# Altium PCB InfoDisplay.PcbDoc (part 1 of 2)
Units mil, origin at the board's own origin, x right, y up, seen from the top; angles counter-clockwise.
Board outline 4606.3 x 1732.28 mil, 2 copper layers (Top Layer, Bottom Layer), stack 65.792 mil thick; 219 components, 174 nets, 685 pads, 194 vias.
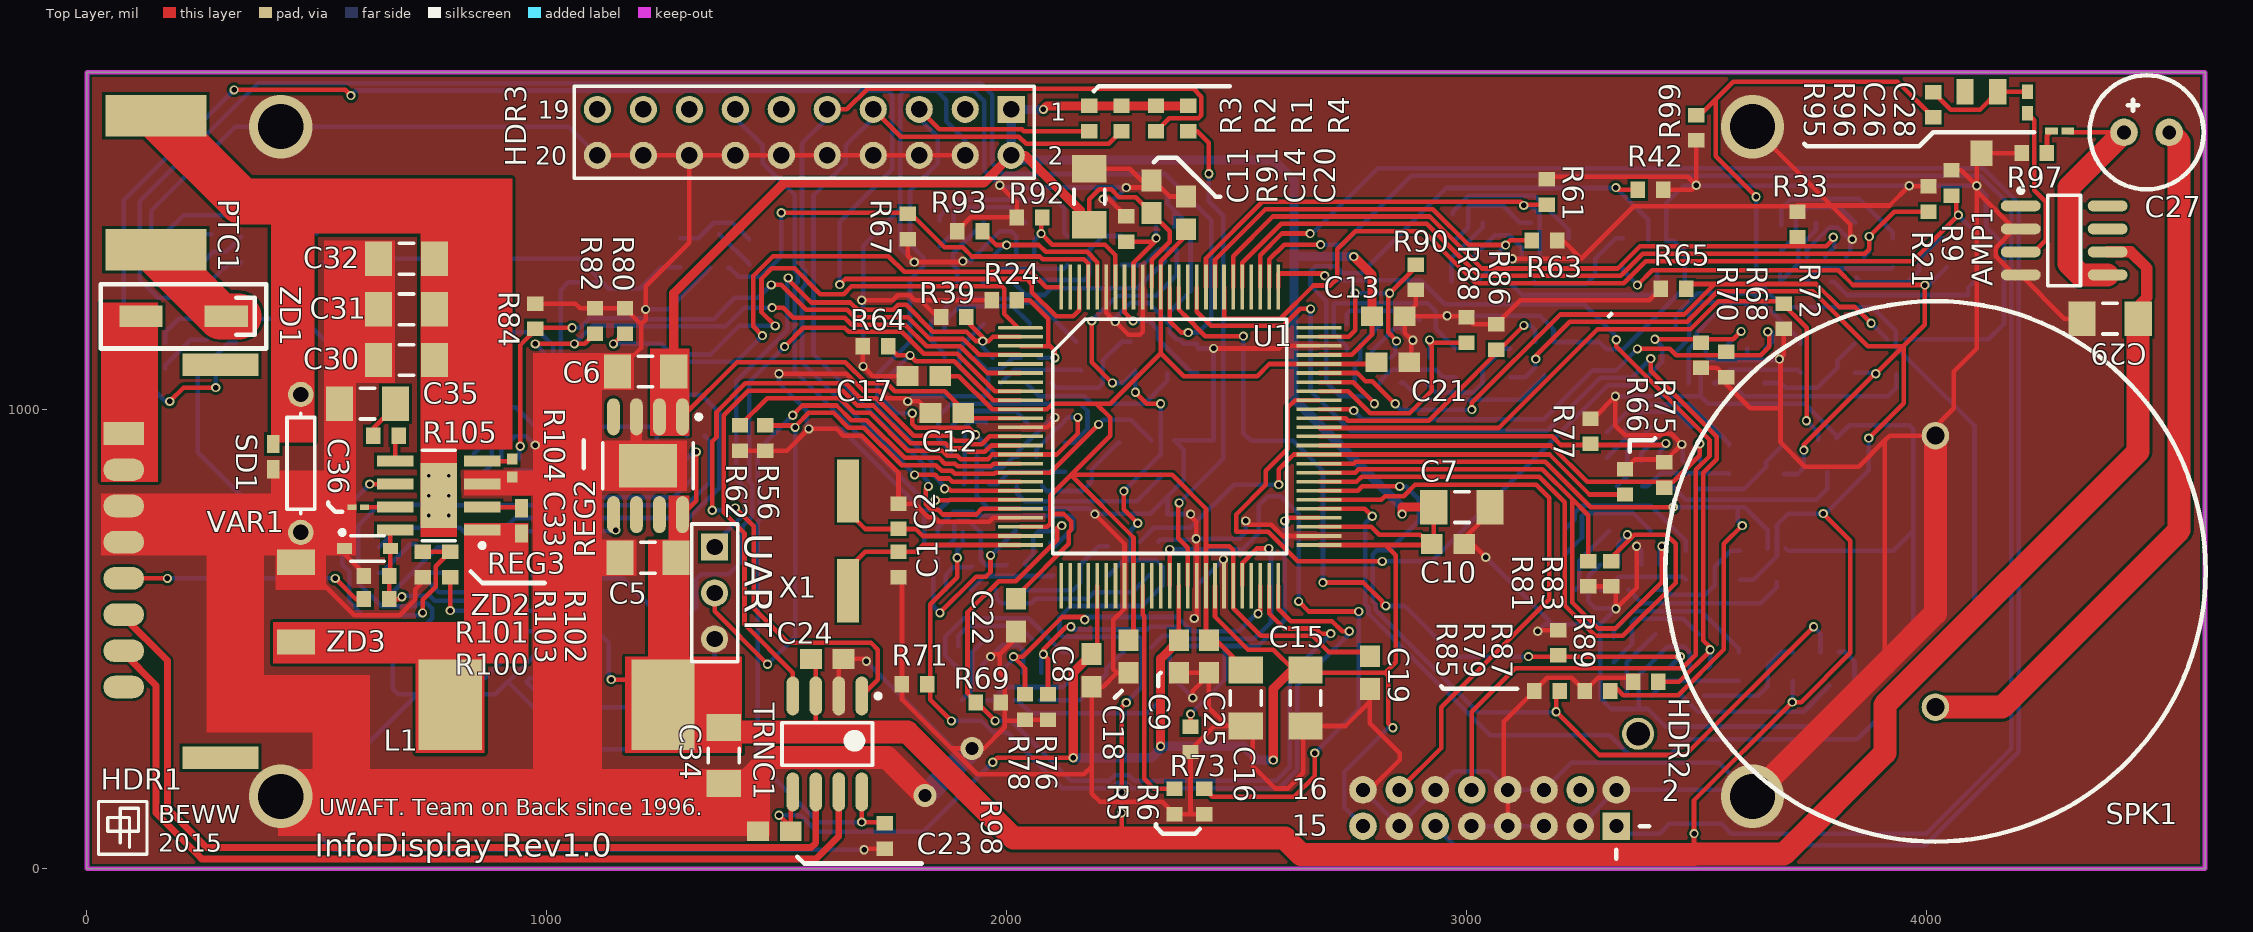
[diagram p0: Top Layer view]
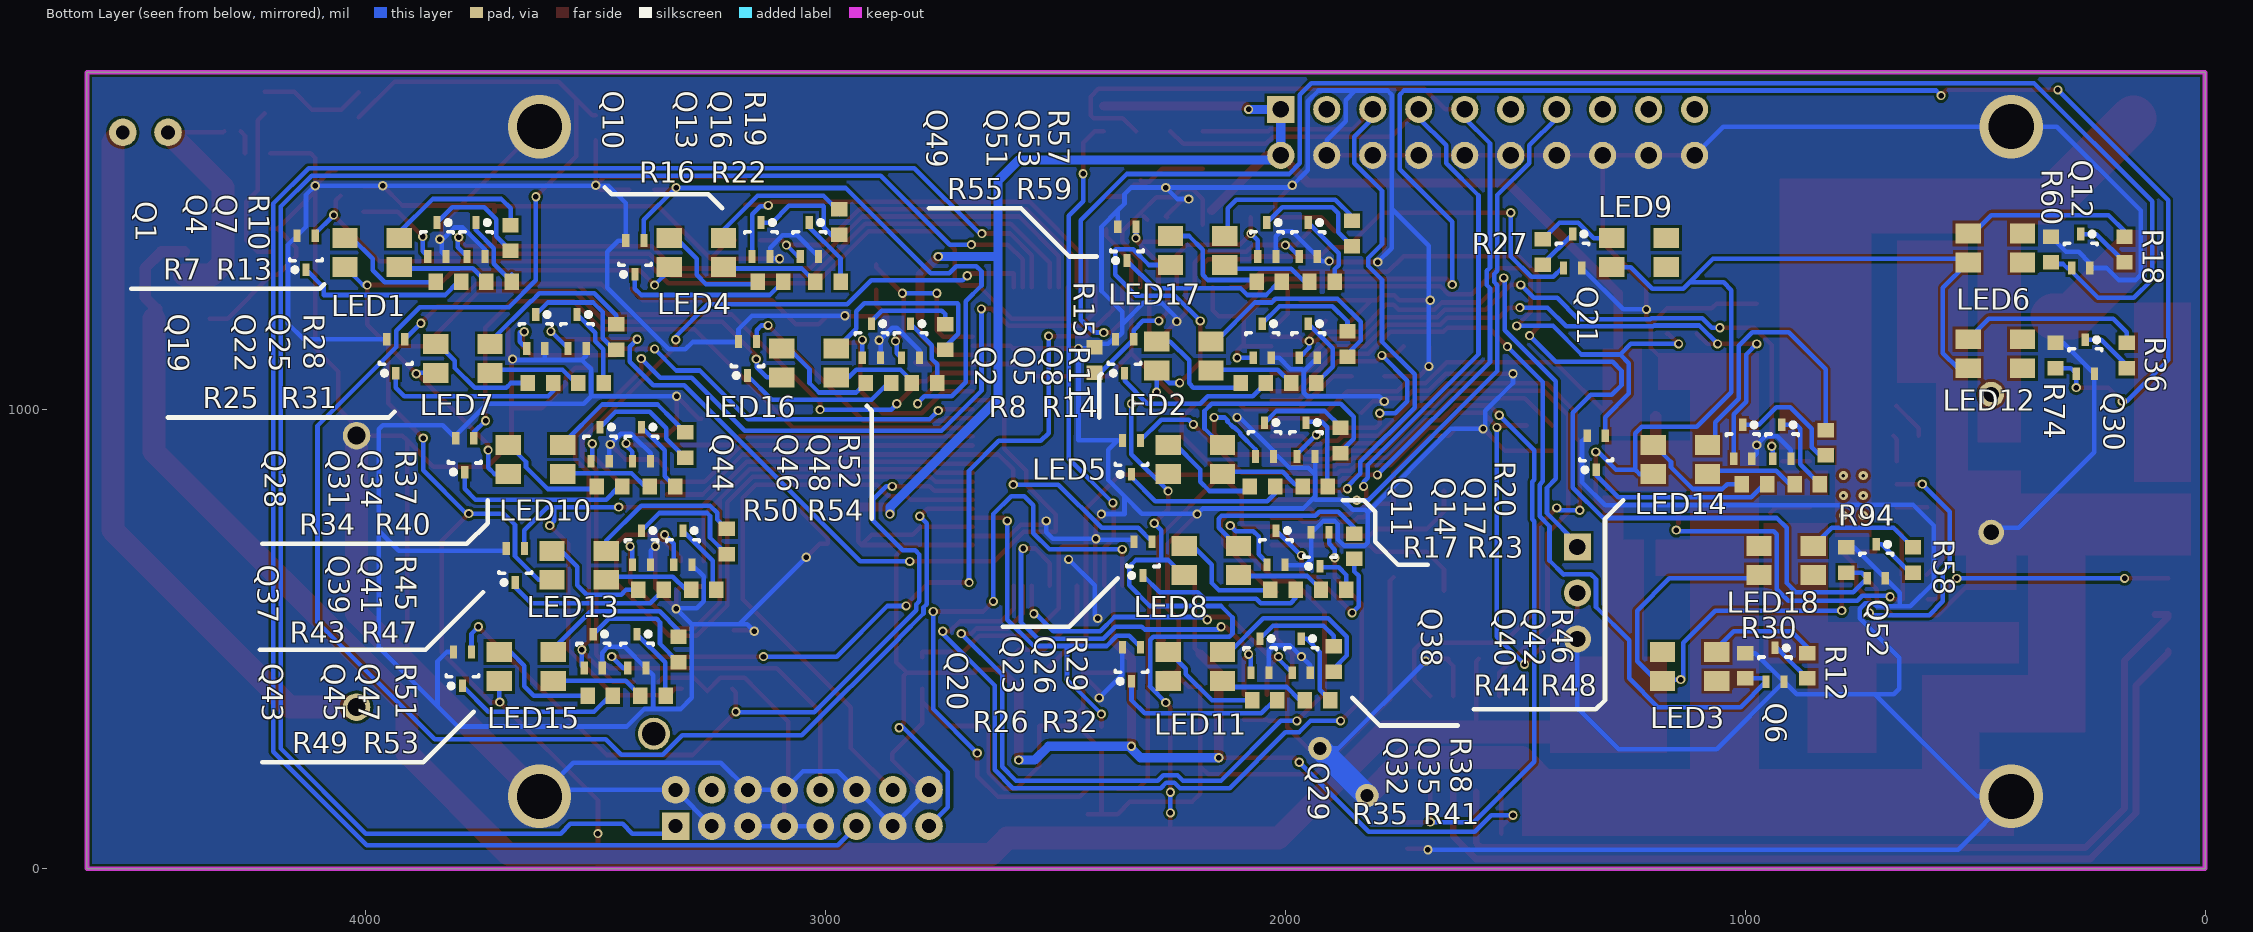
[diagram p1: Bottom Layer view, seen from below]

## Layer stack, top to bottom
Top Solder: solder mask 0.4, Solder Resist, Dk 3.5
Top Layer: signal copper 1.4
Dielectric 1: dielectric 62.9921, FR-4, Dk 4.8
Bottom Layer: signal copper 1.4
Bottom Solder: solder mask 0.4, Solder Resist, Dk 3.5

## Board outline
0,1732.28 4606.3,1732.28 4606.3,0 0,0

## Design rules (kind name [scope] priority, off if disabled: settings)
Clearance [All] p1: gap=6
DiffPairsRouting [All] p1: maxlimit=10 minlimit=10 mostfreqgap=10 toplayer_minwidth=15 toplayer_maxwidth=15 toplayer_prefwidth=15 bottomlayer_minwidth=15 bottomlayer_maxwidth=15 bottomlayer_prefwidth=15 maxuncoupledlength=500
MinimumSolderMaskSliver MinimumSolderMaskSliver_SAM [HasFootprint('100-LQFP')] p1: minsoldermaskwidth=3
MinimumSolderMaskSliver [All] p2: minsoldermaskwidth=4
PolygonConnect [All] p1: connectstyle=Direct reliefconductorwidth=10 reliefentries=4 polygonreliefangle="90 Angle" airgapwidth=10
RoutingVias [All] p1: holewidth=10 width=20 viastyle="Through Hole" minholewidth=12 minwidth=20 maxholewidth=500 maxwidth=450
SilkToSilkClearance [All and not HasFootprint('SOT50P160X110-3N')] p1: silktosilkclearance=4
SilkToSolderMaskClearance [IsPad and not HasFootprint('SOT50P160X110-3N')] p1: minsilkscreentomaskgap=4 clearancetoexposedcopper=TRUE
SolderMaskExpansion [All] p1: expansion=4
Width [All] p1: maxlimit=100 minlimit=10 preferedwidth=10
26 further rules are at their usual default settings.

## Classes and differential pairs
component class InfoDisplayAudio: AMP1 C26 C27 C28 C29 R95 R96 R97 SPK1
component class InfoDisplayLEDs: LED1 LED2 LED3 LED4 LED5 LED6 LED7 LED8 LED9 LED10 LED11 LED12 LED13 LED14 LED15 LED16 LED17 LED18 Q1 Q2 Q4 Q5 Q6 Q7 Q8 Q10 Q11 Q12 Q13 Q14 Q16 Q17 Q19 Q20 Q21 Q22 Q23 Q25 Q26 Q28 Q29 Q30 Q31 Q32 Q34 Q35 Q37 Q38 Q39 Q40 Q41 Q42 Q43 Q44 Q45 Q46 Q47 Q48 Q49 Q51 Q52 Q53 R7 R8 R9 R10 R11 R12 R13 R14 R15 R16 R17 R18 R19 R20 R21 R22 R23 R24 R25 R26 R27 R28 R29 R30 R31 R32 R33 R34 R35 R36 R37 R38 R39 R40 R41 R42 R43 R44 R45 R46 R47 R48 R49 R50 R51 R52 R53 R54 R55 R56 R57 R58 R59 R60 R61 R62 R63 R64 R65 R66 R67 R68 R69 R70 R71 R72 R73 R74 R75 R76 R77 R78 R79 R80 R81 R82 R83 R84 R85 R86 R87 R88 R89 R90 R91 R92 R93 R94
component class InfoDisplay: C1 C2 C7 C8 C9 C10 C11 C12 C13 C14 C15 C16 C17 C18 C19 C20 C21 C22 C23 C24 C25 HDR1 HDR2 HDR3 R1 R2 R3 R4 R5 R6 R98 R99 TRNC1 U1 UART X1
component class InfoDisplayPower: C5 C6 C30 C31 C32 C33 C34 C35 C36 L1 PTC1 R100 R101 R102 R103 R104 R105 REG2 REG3 SD1 VAR1 ZD1 ZD2 ZD3
differential pair CAR_CAN: +CAR_CAN_P -CAR_CAN_N

## Components (designator, comment, footprint, x,y, rotation, side; value= is the part's Value field where it differs from the comment)
AMP1 "LM386MX" SOIC127P600X173-8N 4300,1366.65 r0 top
C1 "CL10C300FB8NNNC" 1608[0603] 1765,661.65 r90 top
C2 "Cap" 1608[0603] 1765,766.65 r270 top
C5 "CGA5L1X7R1E106K160AC" CAPC3216M 1220,676.65 r0 top
C6 "CGA5L1X7R1E106K160AC" CAPC3216M 1215,1081.65 r180 top
C7 "Cap Pol1" CAPC3216M 2990,786.65 r0 top
C8 "Cap" CAPC1608M 2185,431.65 r270 top
C9 "Cap" CAPC1608M 2375,461.65 r270 top
C10 "Cap" CAPC1608M 2960,706.65 r0 top
C11 "Cap Pol1" CAPC3216M 2180,1461.65 r90 top
C12 "Cap" CAPC1608M 1870,991.65 r180 top
C13 "Cap" CAPC1608M 2830,1201.65 r0 top
C14 "Cap" CAPC1608M 2315,1461.65 r90 top
C15 "Cap Pol1" CAPC3216M 2650,371.65 r270 top
C16 "Cap Pol1" CAPC3216M 2520,371.65 r270 top
C17 "Cap" CAPC1608M 1820,1071.65 r180 top
C18 "Cap" CAPC1608M 2265,461.65 r270 top
C19 "Cap" CAPC1608M 2790,426.65 r270 top
C20 "Cap" CAPC1608M 2390,1426.65 r90 top
C21 "Cap" CAPC1608M 2840,1101.65 r0 top
C22 "Cap" CAPC1608M 2020,551.65 r270 top
C23 "Cap" CAPC1608M 1495,81.65 r0 top
C24 "Cap" CAPC1608M 1610,456.65 r0 top
C25 "Cap" CAPC1608M 2440,461.65 r270 top
C26 "GRM155R60J105KE19D" CAPC1005N 4220,1666.65 r270 top
C27 "EEU-FR1A271" EEU-FR1A271 4430,1601.65 r0 top
C28 "GRM033R61E472KA12D" RESC0603N 4290,1604.37 r0 top
C29 "F930J107MAA" CAPC3216M 4400,1196.65 r180 top
C30 "CGA5L1X7R1E106K160AC" CAPC3216M 695,1106.65 r180 top
C31 "CGA5L1X7R1E106K160AC" CAPC3216M 695,1216.65 r180 top
C32 "CGA5L1X7R1E106K160AC" CAPC3216M 695,1326.65 r180 top
C33 "GRM155R71C104KA88D" CAPC1005M 945,756.65 r270 top
C34 "CGA5L1X7R1E106K160AC" CAPC3216M 1385,246.65 r270 top
C35 "CGA5L1X7R1E106K160AC" CAPC3216M 610,1011.65 r180 top
C36 "GRM033R71E821KA01D" RESC0603L 590,786.65 r180 top
HDR1 "Vehicle" Molex_DuraClick_8Pin_Vertical 80,946.65 r270 top
HDR2 "Display" Molex_iGrid_16Pin_Vertical_Alt 3090,171.65 r180 top
HDR3 "JTAG" HDR2X10 2010,1651.65 r180 top
L1 "SRP1265A-220M" SRP1265A-220M 790,356.65 r0 top
LED1 "LED" CLVBA-FKA-CAEDH8BBB7A363CT-ND 4045,1371.65 r180 bottom
LED2 "LED" CLVBA-FKA-CAEDH8BBB7A363CT-ND 2280,1146.65 r180 bottom
LED3 "LED" CLVBA-FKA-CAEDH8BBB7A363CT-ND 1180,471.65 r180 bottom
LED4 "LED" CLVBA-FKA-CAEDH8BBB7A363CT-ND 3340,1371.65 r180 bottom
LED5 "LED" CLVBA-FKA-CAEDH8BBB7A363CT-ND 2255,921.65 r180 bottom
LED6 "LED" CLVBA-FKA-CAEDH8BBB7A363CT-ND 515,1381.65 r180 bottom
LED7 "LED" CLVBA-FKA-CAEDH8BBB7A363CT-ND 3847.94,1141.71 r180 bottom
LED8 "LED" CLVBA-FKA-CAEDH8BBB7A363CT-ND 2220,701.65 r180 bottom
LED9 "LED" CLVBA-FKA-CAEDH8BBB7A363CT-ND 1290,1371.65 r180 bottom
LED10 "LED" CLVBA-FKA-CAEDH8BBB7A363CT-ND 3690,921.65 r180 bottom
LED11 "LED" CLVBA-FKA-CAEDH8BBB7A363CT-ND 2255,471.65 r180 bottom
LED12 "LED" CLVBA-FKA-CAEDH8BBB7A363CT-ND 515,1151.65 r180 bottom
LED13 "LED" CLVBA-FKA-CAEDH8BBB7A363CT-ND 3595,691.65 r180 bottom
LED14 "LED" CLVBA-FKA-CAEDH8BBB7A363CT-ND 1200,921.65 r180 bottom
LED15 "LED" CLVBA-FKA-CAEDH8BBB7A363CT-ND 3710,471.65 r180 bottom
LED16 "LED" CLVBA-FKA-CAEDH8BBB7A363CT-ND 3095,1131.65 r180 bottom
LED17 "LED" CLVBA-FKA-CAEDH8BBB7A363CT-ND 2250,1376.22 r180 bottom
LED18 "LED" CLVBA-FKA-CAEDH8BBB7A363CT-ND 970,701.65 r180 bottom
PTC1 "0ZCF0200AF2C" 0ZCF0200AF2C 150,1346.65 r90 top
Q1 "MOSFET-N" SOT50P160X110-3N 4110,1376.65 r270 bottom
Q2 "MOSFET-N" SOT50P160X110-3N 2330,1151.65 r270 bottom
Q4 "MOSFET-N" SOT50P160X110-3N 3865,1331.65 r90 bottom
Q5 "MOSFET-N" SOT50P160X110-3N 2070,1111.65 r90 bottom
Q6 "MOSFET-N" SOT50P160X110-3N 955,406.65 r90 bottom
Q7 "MOSFET-N" SOT50P160X110-3N 3780,1331.65 r90 bottom
Q8 "MOSFET-N" SOT50P160X110-3N 1970,1111.65 r90 bottom
Q10 "MOSFET-N" SOT50P160X110-3N 3395,1366.65 r270 bottom
Q11 "MOSFET-N" SOT50P160X110-3N 2315,931.65 r270 bottom
Q12 "MOSFET-N" SOT50P160X110-3N 290,1306.65 r90 bottom
Q13 "MOSFET-N" SOT50P160X110-3N 3160,1331.65 r90 bottom
Q14 "MOSFET-N" SOT50P160X110-3N 2065,896.65 r90 bottom
Q16 "MOSFET-N" SOT50P160X110-3N 3055,1331.65 r90 bottom
Q17 "MOSFET-N" SOT50P160X110-3N 1975,896.65 r90 bottom
Q19 "MOSFET-N" SOT50P160X110-3N 3915,1151.65 r270 bottom
Q20 "MOSFET-N" SOT50P160X110-3N 2290,711.65 r270 bottom
Q21 "MOSFET-N" SOT50P160X110-3N 1395,1306.65 r90 bottom
Q22 "MOSFET-N" SOT50P160X110-3N 3650,1131.65 r90 bottom
Q23 "MOSFET-N" SOT50P160X110-3N 2040,661.65 r90 bottom
Q25 "MOSFET-N" SOT50P160X110-3N 3560,1131.65 r90 bottom
Q26 "MOSFET-N" SOT50P160X110-3N 1905,731.65 r270 bottom
Q28 "MOSFET-N" SOT50P160X110-3N 3765,936.65 r270 bottom
Q29 "MOSFET-N" SOT50P160X110-3N 2315,481.65 r270 bottom
Q30 "MOSFET-N" SOT50P160X110-3N 280,1076.65 r90 bottom
Q31 "MOSFET-N" SOT50P160X110-3N 3510,886.65 r90 bottom
Q32 "MOSFET-N" SOT50P160X110-3N 2075,426.65 r90 bottom
Q34 "MOSFET-N" SOT50P160X110-3N 3420,886.65 r90 bottom
Q35 "MOSFET-N" SOT50P160X110-3N 1985.3,426.65 r90 bottom
Q37 "MOSFET-N" SOT50P160X110-3N 3655,696.65 r270 bottom
Q38 "MOSFET-N" SOT50P160X110-3N 1304.37,941.65 r270 bottom
Q39 "MOSFET-N" SOT50P160X110-3N 3420,661.65 r90 bottom
Q40 "MOSFET-N" SOT50P160X110-3N 1025,891.65 r90 bottom
Q41 "MOSFET-N" SOT50P160X110-3N 3330,661.65 r90 bottom
Q42 "MOSFET-N" SOT50P160X110-3N 940,891.65 r90 bottom
Q43 "MOSFET-N" SOT50P160X110-3N 3770,471.65 r270 bottom
Q44 "MOSFET-N" SOT50P160X110-3N 3150,1146.65 r270 bottom
Q45 "MOSFET-N" SOT50P160X110-3N 3525,436.65 r90 bottom
Q46 "MOSFET-N" SOT50P160X110-3N 2920,1111.65 r90 bottom
Q47 "MOSFET-N" SOT50P160X110-3N 3430,436.65 r90 bottom
Q48 "MOSFET-N" SOT50P160X110-3N 2835,1111.65 r90 bottom
Q49 "MOSFET-N" SOT50P160X110-3N 2325,1396.65 r270 bottom
Q51 "MOSFET-N" SOT50P160X110-3N 2060,1331.65 r90 bottom
Q52 "MOSFET-N" SOT50P160X110-3N 734.69,631.97 r90 bottom
Q53 "MOSFET-N" SOT50P160X110-3N 1970,1331.65 r90 bottom
R1 "Res2" 1608[0603] 2325,1631.65 r90 top
R2 "Res2" 1608[0603] 2250,1631.65 r90 top
R3 "Res2" 1608[0603] 2180,1631.65 r90 top
R4 "Res2" 1608[0603] 2395,1631.65 r90 top
R5 "Res2" 1608[0603] 2365,146.65 r90 top
R6 "Res2" 1608[0603] 2430,146.65 r90 top
R7 "Res2" 1608[0603] 3820,1276.65 r0 bottom
R8 "Res2" 1608[0603] 2070,1056.65 r0 bottom
R9 "311-10KGRCT-ND" 1608[0603] 4055,1491.65 r90 top
R10 "Res2" 1608[0603] 3685,1371.65 r90 bottom
R11 "Res2" 1608[0603] 1865,1141.65 r270 bottom
R12 "Res2" 1608[0603] 865,441.65 r90 bottom
R13 "Res2" 1608[0603] 3710,1276.65 r0 bottom
R14 "Res2" 1608[0603] 1960,1056.65 r0 bottom
R15 "311-10KGRCT-ND" 1608[0603] 2415,1106.65 r90 bottom
R16 "Res2" 1608[0603] 3120,1276.65 r0 bottom
R17 "Res2" 1608[0603] 2050,831.65 r0 bottom
R18 "Res2" 1608[0603] 175,1346.65 r90 bottom
R19 "Res2" 1608[0603] 2970,1406.65 r90 bottom
R20 "Res2" 1608[0603] 1880,931.65 r270 bottom
R21 "311-10KGRCT-ND" 1608[0603] 4005,1456.65 r90 top
R22 "Res2" 1608[0603] 2995,1276.65 r0 bottom
R23 "Res2" 1608[0603] 1935,831.65 r0 bottom
R24 "311-10KGRCT-ND" 1608[0603] 1995,1236.65 r180 top
R25 "Res2" 1608[0603] 3620,1056.65 r0 bottom
R26 "Res2" 1608[0603] 2005,606.65 r0 bottom
R27 "Res2" 1608[0603] 1440,1341.65 r90 bottom
R28 "Res2" 1608[0603] 3455,1156.65 r90 bottom
R29 "Res2" 1608[0603] 1850,701.65 r90 bottom
R30 "311-10KGRCT-ND" 1608[0603] 1000,441.65 r270 bottom
R31 "Res2" 1608[0603] 3510,1056.65 r0 bottom
R32 "Res2" 1608[0603] 1895,606.65 r0 bottom
R33 "311-10KGRCT-ND" 1608[0603] 3720,1401.65 r90 top
R34 "Res2" 1608[0603] 3470,831.65 r0 bottom
R35 "Res2" 1608[0603] 2045,366.65 r0 bottom
R36 "Res2" 1608[0603] 170,1116.65 r90 bottom
R37 "Res2" 1608[0603] 3305,921.65 r90 bottom
R38 "Res2" 1608[0603] 1895,456.65 r270 bottom
R39 "311-10KGRCT-ND" 1608[0603] 1885,1200 r180 top
R40 "Res2" 1608[0603] 3355,831.65 r0 bottom
R41 "Res2" 1608[0603] 1930,366.65 r0 bottom
R42 "311-10KGRCT-ND" 1608[0603] 3400,1476.65 r0 top
R43 "Res2" 1608[0603] 3380,606.65 r0 bottom
R44 "Res2" 1608[0603] 980,836.65 r0 bottom
R45 "Res2" 1608[0603] 3215,711.65 r90 bottom
R46 "Res2" 1608[0603] 825,926.65 r90 bottom
R47 "Res2" 1608[0603] 3265,606.65 r0 bottom
R48 "Res2" 1608[0603] 865,836.65 r0 bottom
R49 "Res2" 1608[0603] 3490,376.65 r0 bottom
R50 "Res2" 1608[0603] 2885,1056.65 r0 bottom
R51 "Res2" 1608[0603] 3320,476.65 r90 bottom
R52 "Res2" 1608[0603] 2740,1156.65 r270 bottom
R53 "Res2" 1608[0603] 3375,376.65 r0 bottom
R54 "Res2" 1608[0603] 2785,1056.65 r0 bottom
R55 "Res2" 1608[0603] 2035,1276.65 r0 bottom
R56 "311-10KGRCT-ND" 1608[0603] 1475,936.65 r270 top
R57 "Res2" 1608[0603] 1855,1381.65 r90 bottom
R58 "Res2" 1608[0603] 635,671.65 r90 bottom
R59 "Res2" 1608[0603] 1920,1276.65 r0 bottom
R60 "311-10KGRCT-ND" 1608[0603] 335,1346.65 r90 bottom
R61 "311-10KGRCT-ND" 1608[0603] 3175,1471.65 r90 top
R62 "311-10KGRCT-ND" 1608[0603] 1420,936.65 r270 top
R63 "311-10KGRCT-ND" 1608[0603] 3170,1366.65 r0 top
R64 "311-10KGRCT-ND" 1608[0603] 1715,1136.65 r180 top
R65 "311-10KGRCT-ND" 1608[0603] 3450,1261.65 r180 top
R66 "311-10KGRCT-ND" 1608[0603] 3345,841.65 r90 top
R67 "311-10KGRCT-ND" 1608[0603] 1785,1396.65 r270 top
R68 "311-10KGRCT-ND" 1608[0603] 3565,1096.65 r270 top
R69 "311-10KGRCT-ND" 1608[0603] 1960,361.65 r0 top
R70 "311-10KGRCT-ND" 1608[0603] 3510,1116.97 r270 top
R71 "311-10KGRCT-ND" 1608[0603] 1800,401.65 r180 top
R72 "311-10KGRCT-ND" 1608[0603] 3690,1201.65 r270 top
R73 "311-10KGRCT-ND" 1608[0603] 2400,281.65 r270 top
R74 "311-10KGRCT-ND" 1608[0603] 325,1116.65 r90 bottom
R75 "311-10KGRCT-ND" 1608[0603] 3430,856.65 r90 top
R76 "311-10KGRCT-ND" 1608[0603] 2090,351.65 r270 top
R77 "311-10KGRCT-ND" 1608[0603] 3270,951.65 r90 top
R78 "311-10KGRCT-ND" 1608[0603] 2040,351.65 r270 top
R79 "311-10KGRCT-ND" 1608[0603] 3285,386.65 r180 top
R80 "311-10KGRCT-ND" 1608[0603] 1170,1191.65 r90 top
R81 "311-10KGRCT-ND" 1608[0603] 3265,641.65 r270 top
R82 "311-10KGRCT-ND" 1608[0603] 1105,1191.65 r90 top
R83 "311-10KGRCT-ND" 1608[0603] 3315,641.65 r270 top
R84 "311-10KGRCT-ND" 1608[0603] 975,1201.65 r90 top
R85 "311-10KGRCT-ND" 1608[0603] 3175,386.65 r180 top
R86 "311-10KGRCT-ND" 1608[0603] 3065,1156.65 r90 top
R87 "311-10KGRCT-ND" 1608[0603] 3390,406.65 r180 top
R88 "311-10KGRCT-ND" 1608[0603] 3000,1171.65 r90 top
R89 "311-10KGRCT-ND" 1608[0603] 3200,491.65 r90 top
R90 "311-10KGRCT-ND" 1608[0603] 2890,1286.65 r270 top
R91 "311-10KGRCT-ND" 1608[0603] 2260,1391.65 r90 top
R92 "311-10KGRCT-ND" 1608[0603] 2050,1416.65 r180 top
R93 "311-10KGRCT-ND" 1608[0603] 1920,1386.65 r180 top
R94 "311-10KGRCT-ND" 1608[0603] 780,671.65 r270 bottom
R95 "RC0603FR-07422KL" 1608[0603] 4015,1661.65 r270 top
R96 "PVZ3A103C01R00" PVZ3A103C01R00 4120,1571.65 r180 top
R97 "Res2" 1608[0603] 4235,1556.65 r180 top
R98 "RC0603JR-0710KL" 1608[0603] 1735,71.65 r90 top
R99 "311-10KGRCT-ND" 1608[0603] 3500,1611.65 r90 top
R100 "MCT06030C2702FP500" 1608[0603] 630,586.65 r180 top
R101 "RC0603JR-0710KL" 1608[0603] 630,636.65 r0 top
R102 "RC0603FR-0752K3L" 1608[0603] 790,661.65 r270 top
R103 "RC0603JR-0710KL" 1608[0603] 730,661.65 r90 top
R104 "RC0402FR-0778K7L" RESC1005L 925,871.65 r90 top
R105 "MCT06030C2702FP500" 1608[0603] 650,941.65 r0 top
REG2 "BD33GC0MEFJ-ME2CT-ND" TSOP127P600X100_HS-9M 1220,876.65 r270 top
REG3 "AOZ1284PI" SOIC127P600X170_HS-9N 765,811.65 r180 top
SD1 "UCLAMP1211P.TCT" CAPC1005M 405,896.65 r90 top
SPK1 "PUI AST-03008MR-R" AST-03008MR-R 4020,351.65 r90 top
TRNC1 "ATA6561" SOP127P600X165-8M 1610,271.65 r270 top
U1 "ATSAM3X8C" 100-LQFP 2030,1176.65 r0 top
UART "Header 3" HDR1X3 1365,700 r270 top
VAR1 "V10P14AUTO" AXIAL-0.3 465,881.65 r90 top
X1 "12MHz" XTAL 1655,821.65 r270 top
ZD1 "DB2430100L" DB2430100L 210,1201.65 r0 top
ZD2 "MM3Z3V3ST1G" SOIC127P250X100-2N 610,696.65 r0 top
ZD3 "DB2431200L" DB2431200L 455,666.65 r270 top

## Footprints (in the part's own frame and the unit in brackets; to place one, negate y for a bottom-side part, rotate by r counter-clockwise, add the part's x,y. Pads: shape width x height; smd on the part's side, far side on the other; paste and mask are expansions set on the pad)
0ZCF0200AF2C [mm]
  rect 2.3x5.6 smd: 1(0,0) 2(7.4,0)
  body extent -0.1,-2.7 7.7,2.7, height 2.6
100-LQFP [mm] "Atmel SAM 3X8CA-AU"
  oval 2.5x0.2 smd: 1(0,0)
  rect 2.5x0.2 smd: 2(0,-0.5) 3(0,-1) 4(0,-1.5) 5(0,-2) 6(0,-2.5) 7(0,-3) 8(0,-3.5) 9(0,-4) 10(0,-4.5) 11(0,-5) 12(0,-5.5) 13(0,-6) 14(0,-6.5) 15(0,-7) 16(0,-7.5) 17(0,-8) 18(0,-8.5) 19(0,-9) 20(0,-9.5) 21(0,-10) 22(0,-10.5) 23(0,-11) 24(0,-11.5) 25(0,-12) 51(16.5,-12) 52(16.5,-11.5) 53(16.5,-11) 54(16.5,-10.5) 55(16.5,-10) 56(16.5,-9.5) 57(16.5,-9) 58(16.5,-8.5) 59(16.5,-8) 60(16.5,-7.5) 61(16.5,-7) 62(16.5,-6.5) 63(16.5,-6) 64(16.5,-5.5) 65(16.5,-5) 66(16.5,-4.5) 67(16.5,-4) 68(16.5,-3.5) 69(16.5,-3) 70(16.5,-2.5) 71(16.5,-2) 72(16.5,-1.5) 73(16.5,-1) 74(16.5,-0.5) 75(16.5,0)
  rect 0.2x2.5 smd: 26(2.25,-14.25) 27(2.75,-14.25) 28(3.25,-14.25) 29(3.75,-14.25) 30(4.25,-14.25) 31(4.75,-14.25) 32(5.25,-14.25) 33(5.75,-14.25) 34(6.25,-14.25) 35(6.75,-14.25) 36(7.25,-14.25) 37(7.75,-14.25) 38(8.25,-14.25) 39(8.75,-14.25) 40(9.25,-14.25) 41(9.75,-14.25) 42(10.25,-14.25) 43(10.75,-14.25) 44(11.25,-14.25) 45(11.75,-14.25) 46(12.25,-14.25) 47(12.75,-14.25) 48(13.25,-14.25) 49(13.75,-14.25) 50(14.25,-14.25) 76(14.25,2.25) 77(13.75,2.25) 78(13.25,2.25) 79(12.75,2.25) 80(12.25,2.25) 81(11.75,2.25) 82(11.25,2.25) 83(10.75,2.25) 84(10.25,2.25) 85(9.75,2.25) 86(9.25,2.25) 87(8.75,2.25) 88(8.25,2.25) 89(7.75,2.25) 90(7.25,2.25) 91(6.75,2.25) 92(6.25,2.25) 93(5.75,2.25) 94(5.25,2.25) 95(4.75,2.25) 96(4.25,2.25) 97(3.75,2.25) 98(3.25,2.25) 99(2.75,2.25) 100(2.25,2.25)
  silkscreen extent 1.79,-12.46 14.71,0.47, body extent 1.4,-12.95 15.11,0.89, height 1.6
1608[0603] [mm] "Chip Capacitor, Body 1.6x0.8mm, IPC High Density"
  rect 0.8x0.9 smd: 1(-0.7,0) 2(0.7,0)
  body extent -0.87,-0.48 0.87,0.48, height 1.3
AST-03008MR-R [mil] "PUI 0.15W Speaker"
  round 60 hole 39.37: 1(0,0) 2(590.55,0)
  silkscreen extent -292,-588 883,588, body extent -288,-586 883,586, height 492
AXIAL-0.3 [mm] "Axial Device, Thru-Hole; 2 Leads; 0.3 in Pin Spacing"
  round 1.4 hole 0.85: 1(-3.81,0) 2(3.81,0)
  silkscreen extent -2.77,-0.76 2.77,0.76
CAPC1005M [mm] "Chip Capacitor, Body 1.0x0.5mm, IPC Low Density"
  rect 1x0.7 smd: 1(-0.7,0) 2(0.7,0)
  body extent -0.55,-0.3 0.55,0.3, height 0.6
CAPC1005N [mm] "Chip Capacitor, Body 1.0x0.5mm, IPC Medium Density"
  rect 0.8x0.6 smd: 1(-0.6,0) 2(0.6,0)
  body extent -0.55,-0.3 0.55,0.3, height 0.6
CAPC1608M [mm] "Chip Capacitor, Body 1.6x0.8mm, IPC Low Density"
  rect 1.2x1.1 smd: 1(-0.9,0) 2(0.9,0)
  body extent -0.87,-0.48 0.87,0.48, height 0.85
CAPC3216M [mm] "Chip Capacitor, Body 3.2x1.6mm, IPC Low Density"
  rect 1.5x1.9 smd: 1(-1.55,0) 2(1.55,0)
  silkscreen extent -0.4,-0.85 0.4,0.85, body extent -1.7,-0.9 1.7,0.9, height 1.35
CLVBA-FKA-CAEDH8BBB7A363CT-ND [mm] "3 Colour LED"
  rect 1.4x1.1 smd: 1(0,0) 2(0,-1.6) 3(3,-1.6) 4(3,0)
  body extent -0.13,-2.41 3.17,0.76, height 2.1
DB2430100L [mm] "DB24301"
  rect 2.4x1.2 smd: A(-2.35,0) K(2.35,0)
  silkscreen extent -4.57,-1.78 4.57,1.78, body extent -2.36,-0.71 2.34,0.71, height 0.85
DB2431200L [mm] "DIODE SCHOTTKY 30V 5A TMINIP2"
  rect 1.4x2.1 smd: A(0,0) K(4.4,0)
  body extent -0.25,-1.65 4.7,1.65, height 0.9
EEU-FR1A271 [mil] "Panasonic 270uF Capacitor, Radial"
  round 60 hole 30: 1(0,0) 2(98.43,0)
  silkscreen extent -75,-124 173,124, body extent -72,-128 175,120, height 504
HDR1X3 [mm] "Connector; Header; 3 Position"
  rect 1.5x1.5 hole 0.9: 1(0,0)
  round 1.5 hole 0.9: 2(2.54,0) 3(5.08,0)
  silkscreen extent -1.27,-1.27 6.35,1.27
HDR2X10 [mm] "Connector; Header; 10x2 Position"
  rect 1.5x1.5 hole 0.9: 1(0,0)
  round 1.5 hole 0.9: 2(0,2.54) 3(2.54,0) 4(2.54,2.54) 5(5.08,0) 6(5.08,2.54) 7(7.62,0) 8(7.62,2.54) 9(10.16,0) 10(10.16,2.54) 11(12.7,0) 12(12.7,2.54) 13(15.24,0) 14(15.24,2.54) 15(17.78,0) 16(17.78,2.54) 17(20.32,0) 18(20.32,2.54) 19(22.86,0) 20(22.86,2.54)
  silkscreen extent -1.27,-1.27 24.13,3.81
Molex_DuraClick_8Pin_Vertical [mm]
  rect 1.25x2.25 smd: A1(0,0)
  oval 1.25x2.25 smd: A2(2,0) A3(4,0) A4(6,0) A5(8,0) A6(10,0) A7(12,0) A8(14,0)
  rect 1.25x4.2 smd: CHAS(-3.81,5.334) CHAS(17.907,5.334)
  body extent -4.31,-1.02 18.28,8.13, height 7.97
Molex_iGrid_16Pin_Vertical_Alt [mil] "2.00mm Pitch iGrid™ Wire-to-Board Header, Dual Row, Vertical, with PCB Locator, 16 Circuits, Lead-Free"
  rect 60x60 hole 30: 1(-236.22,78.74)
  round 60 hole 30: 2(-236.22,0) 3(-157.48,78.74) 4(-157.48,0) 5(-78.74,78.74) 6(-78.74,0) 7(0,78.74) 8(0,0) 9(78.74,78.74) 10(78.74,0) 11(157.48,78.74) 12(157.48,0) 13(236.22,78.74) 14(236.22,0) 15(314.96,78.74) 16(314.96,0)
  round 70 hole 51.18: CHAS(-283.46,-122.05)
  silkscreen extent -307,79 -236,150, body extent -315,-161 394,161, height 482
PVZ3A103C01R00 [mm] "Murata 10k Trimmer, 1 Turn"
  rect 0.95x1.4 smd: 1(-0.9,-3) 3(0.9,-3)
  rect 1.2x1.4 smd: 2(0,0.4)
  body extent -1.55,-3.2 1.55,0.4, height 1.86
RESC0603L [mm] "Chip Resistor, Body 0.6x0.3mm, IPC High Density"
  rect 0.5x0.3 smd: 1(-0.35,0) 2(0.35,0)
  body extent -0.32,-0.17 0.32,0.17, height 0.3
RESC0603N [mm] "Chip Resistor, Body 0.6x0.3mm, IPC Medium Density"
  rect 0.7x0.4 smd: 1(-0.45,0) 2(0.45,0)
  body extent -0.32,-0.17 0.32,0.17, height 0.3
RESC1005L [mm] "Chip Resistor, Body 1.1x0.5mm, IPC High Density"
  rect 0.6x0.6 smd: 1(-0.5,0) 2(0.5,0)
  body extent -0.55,-0.3 0.55,0.3, height 0.4
SOIC127P250X100-2N [mm] "SOIC, 2-Leads, Body 1.25x1.70mm, Pitch 1.27mm, IPC Medium Density"
  rect 0.83x0.63 smd: A(-1.27,0) K(1.27,0)
  silkscreen extent -1.52,-0.7 0.92,1.01, body extent -0.9,-0.7 0.9,0.7, height 1
SOIC127P600X170_HS-9N [mm] "SOIC, 8-Leads, Body 4.90x3.90mm, Pitch 1.27mm, Thermal Pad 3.60.2x2.00.2mm, IPC Medium Density"
  rect 2x0.6 smd: 1(-2.4,1.905) 2(-2.4,0.635) 3(-2.4,-0.635) 4(-2.4,-1.905) 5(2.4,-1.905) 6(2.4,-0.635) 7(2.4,0.635) 8(2.4,1.905)
  rect 2x3.6 smd: 9(0,0)
  silkscreen extent -2.53,-2.5 0.9,2.88, body extent -2,-2.5 2,2.5, height 1.7
SOIC127P600X173-8N [mm] "SOIC, 8-Leads, Body 4.90x3.90mm, Pitch 1.27mm, IPC Medium Density"
  oval 2.2x0.6 smd: 1(-2.4,1.905) 2(-2.4,0.635) 3(-2.4,-0.635) 4(-2.4,-1.905) 5(2.4,-1.905) 6(2.4,-0.635) 7(2.4,0.635) 8(2.4,1.905)
  silkscreen extent -2.52,-2.5 0.9,2.88, body extent -2,-2.5 2,2.5, height 1.74
SOP127P600X165-8M [mm] "SOP, 8-Leads, Body 4.90x3.90mm, Pitch 1.27mm, IPC Low Density"
  oval 2.15x0.7 smd: 1(-2.65,1.905) 2(-2.65,0.635) 3(-2.65,-0.635) 4(-2.65,-1.905) 5(2.65,-1.905) 6(2.65,-0.635) 7(2.65,0.635) 8(2.65,1.905)
  silkscreen extent -2.77,-2.5 1.18,2.93, body extent -2,-2.5 2,2.5, height 1.65
SOT50P160X110-3N [mm] "SOT23, 3-Leads, Body 1.60x1.60mm, Pitch 0.50mm, IPC Medium Density"
  rect 0.7x0.4 smd: 1(1.875,-0.5) 2(0,0)
  rect 0.7x0.4 smd paste+0: 3(0,-1)
  silkscreen extent 1.27,-1.4 2,0.4, body extent 0.48,-1.4 1.37,0.4, height 1.1
SRP1265A-220M [mm] "Bourns 22uH Inductor"
  rect 3.5x5 smd: 1(0,0) 2(11.75,0)
  body extent -1.02,-6.35 12.7,6.35, height 6.2
TSOP127P600X100_HS-9M [mm] "TSOP, 8-Leads, Body 4.90x3.90mm, Pitch 1.27mm, Thermal Pad 3.20.2x2.40.2mm, IPC Low Density"
  oval 2.05x0.7 smd: 1(-2.7,1.905) 2(-2.7,0.635) 3(-2.7,-0.635) 4(-2.7,-1.905) 5(2.7,-1.905) 6(2.7,-0.635) 7(2.7,0.635) 8(2.7,1.905)
  rect 2.4x3.2 smd: 9(0,0)
  silkscreen extent -2.82,-2.5 1.27,2.93, body extent -2,-2.5 2,2.5, height 1
XTAL [mm]
  rect 3.5x1.2 smd: 1(0,0) 2(5.5,0)
  body extent -0.89,-2.03 6.35,2.03, height 2.3

## Part data
AMP1: "TI Audio Amplifier, 0.350W, 5-12V"
C1 C5 C6 C26 C28 C30 C31 C32 C33 C34 C35 C36: library part Cap, "Capacitor"
C2 C8 C9 C10 C12 C13 C14 C17 C18 C19 C20 C21 C22 C23 C24 C25: "Capacitor"
C7 C11 C15 C16: "Polarized Capactior"
C27 C29: library part "Cap Pol1", "Polarized Capactior"
HDR1: library part Molex_DuraClick_8Pin_Vertical, "Molex iClick Series Connector, 8 Pin"
HDR2: library part Molex_iGrid_16Pin_Vertical, "Molex iGrid Series Connector, 2 Row, 16 Pin"
HDR3: library part "Header 10X2", "JTAG Header, 10-Pin, Dual row, 2.56 pitch, Male"
L1: library part Inductor, "Inductor"
LED1: "LED RGB"
PTC1: "PTC device, 2A hold, 4A trip"
Q1 Q2 Q4 Q5 Q6 Q7 Q8 Q10 Q11 Q12 Q13 Q14 Q16 Q17 Q19 Q20 Q21 Q22 Q23 Q25 Q26 Q28 Q29 Q30 Q31 Q32 Q34 Q35 Q37 Q38 Q39 Q40 Q41 Q42 Q43 Q44 Q45 Q46 Q47 Q48 Q49 Q51 Q52 Q53: "N-Channel MOSFET"
R1 R2 R3 R4 R5 R6 R7 R8 R10 R11 R12 R13 R14 R16 R17 R18 R19 R20 R22 R23 R25 R26 R27 R28 R29 R31 R32 R34 R35 R36 R37 R38 R40 R41 R43 R44 R45 R46 R47 R48 R49 R50 R51 R52 R53 R54 R55 R57 R58 R59 R97: "Resistor"
R9 R15 R21 R24 R30 R33 R39 R42 R56 R60 R61 R62 R63 R64 R65 R66 R67 R68 R69 R70 R71 R72 R73 R74 R75 R76 R77 R78 R79 R80 R81 R82 R83 R84 R85 R86 R87 R88 R89 R90 R91 R92 R93 R94 R95 R98 R99 R100 R101 R102 R103 R104 R105: library part Res2, "Resistor"
R96: library part "Res Adj2", "Variable Resistor"
REG2: "Rohm 3.3V LDO"
REG3: "A&M 4A Buck Regulator, 0.8 to 30V"
SD1: library part UCLAMP0511PQTCT, "Semtech TVS Diode"
SPK1: "PUI 0.15W Speaker, 8 Ohm"
TRNC1: "Atmel CAN Transceiver"
U1: library part ATSAM3X8CA-AU, "Atmel SAM Series Microcontroller"
UART: "Header, 3-Pin"
VAR1: library part "Res Varistor", "Varistor (Voltage-Sensitive Resistor)"
X1: library part XTAL, "12MHz Crystal Oscillator"
ZD1: "Panasonic Schottky Diode, 2A"
ZD2: library part DB2430100L, "3.3V Zener Diode"
ZD3: library part DB2430100L, "Shottky Diode, 5A, 30V, 510 mV"

## Via types
v1: diameter 20, hole 12, Top Layer to Bottom Layer, tented both sides, 181 vias
v2: diameter 19.68, hole 7.87, Top Layer to Bottom Layer, 6 vias
v3: diameter 137.8, hole 98.43, Top Layer to Bottom Layer, 4 vias
v4: diameter 50, hole 28, Top Layer to Bottom Layer, 2 vias
v5: diameter 20, hole 12, Top Layer to Bottom Layer, 1 vias

## Nets (pads, with @x,y where several pads share a name; then routed paths per layer and width w, separated by ;. In a path a pad name is that pad's centre, name@x,y a point inside that pad or via, vN(x,y) a via of type N, cw(c..) or ccw(c..) an arc to the next point about the centre after c; other vN are vias at no path point)
3V3: C6.1 C7.1 C8.1 C9.1 C10.1 C11.1 C12.1 C13.1 C14.1 C15.1 C23.2 HDR2.15 HDR3.1 HDR3.2 R1.2 R2.2 R3.2 R4.2 REG2.1 REG2.2 TRNC1.5 U1.11 U1.30 U1.39 U1.43 U1.51 U1.53 U1.72 U1.90 | length 9187.9
  Top Layer w10: REG2.1@1295,982.95 1413.7,1101.65 1649.3,1101.65 1695.3,1055.65 1739.73,1055.65 1756.39,1039 1865.12,1039 C12.1@1915.43,988.69 ; v1(1505,116.65) C23.2@1530.43,91.22 ; C23.2@1530.43,76.65 C23.2@1530.43,81.65 C23.2@1530.43,91.22 ; TRNC1.5@1535,167.32 1530.43,162.76 C23.2@1530.43,91.22 ; C12.1@1915.43,981.65 1917.28,979.8 U1.11@2030,979.8 ; v1(1970,231.65) 1980,241.65 v1(2145,241.65) ; C11.1@2180,1400.63 2180,1456.35 2201.3,1477.65 2227.48,1477.65 2244.48,1460.65 2280.57,1460.65 C14.1@2315,1426.22 2355,1386.22 2355,1363.85 2315.43,1324.28 U1.90@2315.43,1265.24 ; C8.1@2185,467.09 2197.32,479.41 U1.30@2197.32,615.63 ; C14.1@2300,1411.22 C14.1@2307.72,1418.94 ; U1.39@2374.49,615.63 2374.49,497.6 C9.1@2375,497.09 ; U1.43@2453.23,615.63 2453.23,548.43 2525,476.65 2580,476.65 2623.98,432.68 C15.1@2650,432.68 2675,432.68 2675,426.65 2823,426.65 ; U1.53@2679.61,743.58 2793.07,743.58 2810,726.65 2899.69,726.65 2922.13,704.21 U1.51@2679.61,704.21 2823.44,704.21 2846,681.65 2846,449.65 2823,426.65 ; U1.72@2679.61,1117.6 2750.95,1117.6 2794.57,1161.22 C13.1@2794.57,1201.65 ; v1(2840,306.65) 2830,316.65 2830,419.65 2823,426.65 ; C10.1@2924.57,706.65 2928.98,711.06 C7.1@2928.98,786.65
  Top Layer w20: C6.1@1276.02,1081.65 1276.02,1251.65 1516.02,1491.65 1950,1491.65 HDR3.2@2010,1551.65 2040,1551.65 2160,1431.65 ; C12.1@1915.43,981.65 C12.1@1915.43,988.69 ; v1(2080,1651.65) 2087.56,1659.21 R4.2@2395,1659.21 ; v1(2145,241.65) 2145,427.09 C8.1@2185,467.09 ; v1(2335,266.65) 2335,457.09 C9.1@2375,497.09 ; v1(2580,236.65) 2580,391.65 2621.02,432.68 C15.1@2623.98,432.68 ; v1(2755,1331.65) 2794.57,1292.09 C13.1@2794.57,1201.65 ; v1(2860,771.65) 2860,786.65 C7.1@2928.98,786.65
  Bottom Layer w10: v1(1505,116.65) 1552.37,116.65 1588.37,80.65 1819,80.65 v1(1970,231.65) ; 2623,1036.65 2625,1036.65 ; HDR2.15@2775.04,92.91 2734,133.95 2734,210.65 2835,311.65 v1(2840,306.65)
  Bottom Layer w20: v1(2080,1651.65) HDR3.1@2010,1651.65 HDR3.2@2010,1551.65 2020,1541.65 2580,1541.65 2625,1496.65 2625,1331.65 ; v1(2145,241.65) 2315,241.65 2340,266.65 2515,266.65 2545,236.65 v1(2580,236.65) ; v1(2755,1331.65) 2625,1331.65 ; v1(2860,771.65) 2860,786.65 2625,1021.65 2625,1331.65
5V0: AMP1.6 C5.2 C24.1 C29.1 C34.1 L1.2 LED1.2 LED2.2 LED3.2 LED4.2 LED5.2 LED6.2 LED7.2 LED8.2 LED9.2 LED10.2 LED11.2 LED12.2 LED13.2 LED14.2 LED15.2 LED16.2 LED17.2 LED18.2 R102.2 REG2.8 TRNC1.3 | length 13915
  Top Layer w10: v1(790,561.65) R102.2@790,634.09 ; v1(1140,411.65) 1197.6,411.65 L1.2@1252.6,356.65 ; 1180,354.25 L1.2@1252.6,281.65 ; REG2.8@1295,770.35 1325,800.35 v1(1325,906.65) ; C24.1@1579.57,456.65 1585,451.22 TRNC1.3@1585,375.98 1585,296.65 ; v1(2185,1191.65) 2185,1101.65 v1(2230,1056.65) ; 2250,66.65 v1(2250,121.65) ; v1(2250,166.65) 2250,351.65 v1(2260,361.65) ; v1(2255,821.65) 2255,781.65 v1(2285,751.65) ; v1(2280,1036.65) 2305,1011.65 v1(2335,1011.65) ; v1(3150.88,1108.59) 3150.88,1115.78 3224.76,1189.65 3480.63,1189.65 3546.94,1255.96 3753.69,1255.96 3873,1136.65 3951,1136.65 3951,1012.65 v1(3875,936.65) ; v1(3372,1269.65) 3404,1301.65 3808.75,1301.65 3840.75,1269.65 v1(3997,1269.65) 3997,1183.65 v1(3890,1076.65) 3888,1076.65 3734,922.65 v1(3734,910.65) ; 3495,31.65 v1(3495,76.65) 3495,148.91 v1(3708.73,362.64) ; v1@3715.47,362.64 3727.99,362.64 3835,469.65 3835,713.65 v1(3776,772.65)
  Top Layer w25: L1.2@1252.6,281.65 L1.2@1252.6,356.65 ; AMP1.6@4394.49,1341.65 4445,1341.65 4480,1306.65 4480,1242.68 C29.1@4455,1217.68
  Top Layer w50: C34.1@1385,307.68 1395.02,297.65 1784,297.65 2015,66.65 2250,66.65 2605,66.65 2640,31.65 3495,31.65 ; 3495,31.91 3690,31.91 3910,251.91 3910,356.65 4461.02,907.68 C29.1@4461.02,1196.65
  Bottom Layer w10: LED6.2@515,1318.66 570,1263.66 570,1121.65 LED12.2@537.01,1088.66 ; LED6.2@532.01,1318.66 540,1326.65 1070,1326.65 1135,1261.65 1201.99,1261.65 1249,1308.66 LED9.2@1290,1308.66 ; v1(790,561.65) 1064.77,561.65 1135,491.42 1135,416.65 v1(1140,411.65) LED3.2@1177.01,411.65 ; LED18.2@970,638.66 977.01,631.65 1165,631.65 1235,561.65 1235,451.65 1192.01,408.66 LED3.2@1180,408.66 ; 1120,1275.65 1047,1275.65 1030,1258.65 1030,1036.65 1105,961.65 1225,961.65 1239,947.65 1239,867.65 ; LED14.2@1200,858.66 1230.01,858.66 1239,867.65 ; v1(1325,906.65) 1320,906.65 1281,867.65 1239,867.65 ; v1(2185,1191.65) 2240,1246.65 2325,1246.65 2370,1291.65 2370,1346.65 2369.04,1347.61 2330.96,1347.61 2296.57,1313.23 LED17.2@2250,1313.23 ; LED8.2@2220,638.66 2221.78,638.66 2254.77,671.65 2270,671.65 ; v1(2230,1056.65) 2252.99,1056.65 LED2.2@2280,1083.66 v1(2280,1036.65) ; v1(2250,121.65) v1(2250,166.65) ; v1(2255,821.65) 2335,901.65 v1(2335,1011.65) ; v1(2260,361.65) 2295,396.65 2293.56,398.09 2293.56,498.09 2287.35,504.31 2122.35,504.31 2115,511.65 2115,546.65 2140,571.65 2295,571.65 2340,616.65 2340,656.65 2325,671.65 2270,671.65 ; v1(2285,751.65) 2270,736.65 2270,671.65 ; LED16.2@3095,1068.66 3128.01,1068.66 3150,1090.65 3150,1107.71 v1(3150.88,1108.59) ; LED4.2@3340,1308.66 3340,1301.65 v1(3372,1269.65) ; LED13.2@3595,628.66 3624.22,628.66 3675.5,679.94 3675.5,748.16 3699.99,772.65 3781,772.65 3875,866.65 v1(3875,936.65) ; LED10.2@3690,858.66 3720.01,858.66 3734,872.65 v1(3734,910.65) ; v1(3708.73,362.64) 3710,363.91 LED15.2@3710,408.66 ; LED7.2@3845,1078.66 v1@3885.99,1078.66 ; v1(3997,1269.65) 4005.99,1269.65 LED1.2@4045,1308.66
12V0: HDR1.A1 HDR1.A2 ZD1.A
12V0S: C30.1 C31.1 C32.1 PTC1.2 REG3.9 SD1.2 VAR1.2 | length 369.2
  Top Layer w100: PTC1.2@155.67,1632.32 336.34,1451.65 450,1451.65
  other v2: 743.35,768.35 786.65,768.35 743.35,811.65 786.65,811.65 743.35,854.96 786.65,854.96
CAN_RECEIVE: TRNC1.4 U1.14 | length 1400.3
  Top Layer w10: TRNC1.4@1535,375.98 1535,426.65 1430,531.65 1430,730 1385,775 1385,986.65 1438,1039.65 1643.42,1039.65 1675.42,1007.65 1709.51,1007.65 1791.51,925.65 1866.21,925.65 1877.21,914.65 1909.67,914.65 1917.17,907.15 1952.83,907.15 1966.42,920.75 U1.14@2030,920.75
CAN_TRANSCEIVERWAKE: R98.2 TRNC1.8 U1.16 | length 1746.9
  Top Layer w10: v1(1535,986.65) 1556,1007.65 1630.17,1007.65 1662.17,975.65 1696.26,975.65 1778.26,893.65 1852.95,893.65 1865.23,881.38 1887.69,881.38 1893.92,875.15 1966.08,875.15 1972.31,881.38 U1.16@2030,881.38 ; TRNC1.8@1685,167.32 v1(1685,101.65) 1732.56,101.65 R98.2@1735,99.21
  Bottom Layer w10: v1(1535,986.65) 1459,910.65 1459,846.25 1463,842.25 1463,760.12 1459,756.12 1459,232.65 1590,101.65 v1(1685,101.65)
CAN_TRANSMIT: TRNC1.1 U1.13 | length 1675.3
  Top Layer w10: v1(1360,780) 1360,929.28 1369,938.28 1369,993.28 1431.37,1055.65 1650.05,1055.65 1682.05,1023.65 1716.14,1023.65 1798.14,941.65 1875,941.65 1886,930.65 1916.3,930.65 1923.8,923.15 1946.2,923.15 1963.48,940.43 U1.13@2030,940.43 ; v1(1410,785) 1450,745 1450,566.65 1525,491.65 1705,491.65 1720,476.65 1720,410.98 TRNC1.1@1685,375.98
  Bottom Layer w10: v1(1360,780) 1405,780 v1(1410,785)
CAR_CAN_N: HDR1.A6 TRNC1.6 | length 2050
  Top Layer w15: HDR1.A6@109.06,552.95 HDR1.A6@80,552.95 80,547.79 175,452.79 175,131.65 260,46.65 1430.2,46.65 1430.35,46.5 1488.78,46.5 1488.93,46.65 1501.07,46.65 1501.22,46.5 1559.65,46.5 1559.8,46.65 1575,46.65 1585,56.65 TRNC1.6@1585,167.32
CAR_CAN_P: HDR1.A7 TRNC1.7 | length 2024.8
  Top Layer w15: HDR1.A7@80,474.21 80,469.05 150,399.05 150,121.3 242.32,28.98 249.65,21.65 1585.36,21.65 1592.68,28.98 1635,71.3 TRNC1.7@1635,167.32
CAR_WAKESIGNAL: HDR1.A5 R100.2 | length 541.1
  Top Layer w10: HDR1.A5@80,631.69 v1(175,631.65) v1(175,631.65) ; v1(540,631.65) 585,586.65 R100.2@602.44,586.65
  Bottom Layer w10: v1(175,631.65) v1(540,631.65)
GND: AMP1.2 AMP1.4 C1.1 C2.1 C5.1 C6.2 C7.2 C8.2 C9.2 C10.2 C11.2 C12.2 C13.2 C14.2 C15.2 C16.2 C17.2 C18.2 C19.2 C20.2 C21.2 C22.2 C23.1 C24.2 C25.2 C29.2 C30.2 C31.2 C32.2 C34.2 C35.2 C36.2 HDR1.A3 HDR1.A4 HDR2.2 HDR2.3 HDR2.5 HDR2.6 HDR2.7 HDR2.8 HDR2.9 HDR2.12 HDR2.13 HDR2.16 HDR3.4 HDR3.6 HDR3.8 HDR3.10 HDR3.12 HDR3.14 HDR3.16 HDR3.18 HDR3.20 Q1.3 Q2.3 Q4.3 Q5.3 Q6.3 Q7.3 Q8.3 Q10.3 Q11.3 Q12.3 Q13.3 Q14.3 Q16.3 Q17.3 Q19.3 Q20.3 Q21.3 Q22.3 Q23.3 Q25.3 Q26.3 Q28.3 Q29.3 Q30.3 Q31.3 Q32.3 Q34.3 Q35.3 Q37.3 Q38.3 Q39.3 Q40.3 Q41.3 Q42.3 Q43.3 Q44.3 Q45.3 Q46.3 Q47.3 Q48.3 Q49.3 Q51.3 Q52.3 Q53.3 R5.1 R6.1 R9.2 R15.2 R21.2 R24.2 R30.1 R33.2 R39.2 R42.2 R56.2 R60.2 R61.2 R62.2 R63.2 R64.2 R65.2 R66.2 R67.2 R68.2 R69.2 R70.2 R71.2 R72.2 R73.2 R74.2 R75.2 R76.2 R77.2 R78.2 R79.2 R80.2 R81.2 R82.2 R83.2 R84.2 R85.2 R86.2 R87.2 R88.2 R89.2 R90.2 R91.2 R92.2 R93.2 R94.1 R96.2 R97.2 R98.1 R99.1 R101.1 R103.1 R104.1 REG2.3 REG2.9 REG3.3 SD1.1 SPK1.2 TRNC1.2 U1.12 U1.22 U1.33 U1.41 U1.44 U1.52 U1.73 U1.91 U1.95 UART.3 VAR1.1 ZD2.A ZD3.A | length 38853.3
  Top Layer w10: ZD3.A@473.72,659.21 581.28,551.65 680,551.65 714,585.65 714,608.1 R103.1@740,634.09 ; ZD2.A@560,696.65 560,684.21 R101.1@605,639.21 ; REG3.3@859.49,836.65 919.69,836.65 R104.1@925,841.97 ; R84.2@975,1229.21 1062.44,1229.21 1072.44,1219.21 R82.2@1105,1219.21 R80.2@1170,1219.21 1205,1184.21 ; HDR3.20@1110,1551.65 HDR3.18@1210,1551.65 HDR3.16@1310,1551.65 ; C6.2@1153.98,1081.65 1205,1132.68 1205,1184.21 ; C34.2@1385,185.63 1385,151.22 C23.1@1459.57,76.65 ; R62.2@1420,909.09 R56.2@1475,909.09 1522.44,909.09 v1(1570,956.65) 1630,956.65 1645,941.65 1685,941.65 1765,861.65 C2.1@1765,794.21 1800.11,794.21 1829.67,764.65 1842,764.65 1852,754.65 1962,754.65 1970.62,763.27 U1.22@2030,763.27 ; v1(1505,1076.65) 1651.67,1076.65 1688.67,1039.65 1722.76,1039.65 1739.42,1023 1779.65,1023 v1@1785,1017.65 ; TRNC1.2@1635,375.98 1635,441.22 C24.2@1650.43,456.65 ; C24.2@1645.43,456.65 C24.2@1650.43,456.65 ; v1(1685,1236.65) 1751.97,1236.65 1762.97,1247.65 1789,1247.65 1800,1236.65 1815,1236.65 ; R64.2@1687.44,1136.65 1687.44,1093.21 v1(1688,1092.65) 1709,1071.65 C17.2@1784.57,1071.65 ; v1(1690,41.65) 1692.44,44.09 R98.1@1735,44.09 ; v1(1695,451.65) 1690,456.65 C24.2@1650.43,456.65 ; C1.1@1765,634.1 1772.44,626.66 R71.2@1772.44,401.65 1772.44,369.21 ; v1(1785,1016.65) 1809.57,1016.65 C12.2@1834.57,991.65 ; R67.2@1785,1369.09 1785,1333.65 v1(1799,1319.65) 1903,1319.65 v1(1905,1321.65) ; R39.2@1857.44,1191.65 1815,1234.09 1815,1236.65 ; R93.2@1892.44,1386.65 1922.44,1416.65 R92.2@2022.44,1416.65 2022.44,1449.21 v1(1985,1486.65) ; HDR3.4@1910,1551.65 HDR3.6@1810,1551.65 HDR3.8@1710,1551.65 HDR3.10@1610,1551.65 HDR3.12@1510,1551.65 HDR3.14@1410,1551.65 HDR3.16@1310,1551.65 ; v1(1965,461.65) 1969.7,466.35 1985,466.35 ; R24.2@1967.44,1236.65 1815,1236.65 ; C22.2@2020,531.22 2020,501.35 1985,466.35 ; U1.12@2030,960.12 2088.47,960.12 2105,976.65 v1(2105,981.65) ; R76.2@2090,324.09 R78.2@2040,324.09 2037.56,321.65 1996,321.65 ; C11.2@2180,1522.68 2267.98,1522.68 2296,1494.65 C14.2@2312.57,1494.65 ; v1(2192,771.65) 2256.38,707.28 U1.33@2256.38,615.63 2256.38,566.03 2232,541.65 2232,434.22 2240,426.22 ; v1(2210,1456.65) 2222.56,1456.65 R91.2@2260,1419.21 R91.2@2257.44,1416.65 ; U1.95@2217.01,1265.24 2217.01,1209.65 2265,1161.65 2290,1161.65 2296,1167.65 2296,1264.98 U1.91@2295.75,1265.24 ; v1(2260,1481.65) 2299.57,1481.65 C14.2@2312.57,1494.65 ; C18.2@2265,426.22 2240,426.22 ; C14.2@2315,1487.09 2329.57,1487.09 2354.57,1462.09 C20.2@2390,1462.09 ; C14.2@2315,1497.09 C14.2@2312.57,1494.65 ; C9.2@2375,426.22 C25.2@2440,426.22 C25.2@2440,421.65 ; v1(2400,771.65) 2395,771.65 2412,754.65 v1(2412,717.65) ; 2401,119.1 R6.1@2430,119.1 ; v1(2405,371.65) 2405,386.65 C25.2@2440,421.65 ; v1(2407.91,544.5) 2407.91,543.75 2410,541.65 2413.86,545.51 U1.41@2413.86,615.63 v1@2413.86,715.8 ; v1(2450,1131.65) 2592.37,1131.65 2598,1137.28 U1.73@2679.61,1137.28 ; v1(2520,756.65) 2528,748.65 2575.63,748.65 2600.38,723.9 U1.52@2679.61,723.9 ; HDR2.16@2775.04,171.65 2790,171.65 2855,236.65 2855,251.65 2790,316.65 2790,363.65 ; C19.2@2790,391.22 2790,363.65 ; C13.2@2871,1201.65 2997.56,1201.65 R88.2@3000,1199.21 3015,1184.21 R86.2@3065,1184.21 3117.44,1236.65 3397.44,1236.65 R65.2@3422.44,1261.65 ; C21.2@2875.43,1101.65 2880,1106.22 2880,1151.65 2865.43,1166.22 C13.2@2865.43,1201.65 2890,1226.22 R90.2@2890,1259.09 ; v1(3042,677.65) 3013,706.65 C10.2@2995.43,706.65 2995.43,718.65 3051.02,774.24 C7.2@3051.02,786.65 ; HDR2.7@3090,92.91 HDR2.8@3090,171.65 3081,180.65 3081,320.21 R85.2@3147.44,386.65 3176.16,415.37 3228.72,415.37 R79.2@3257.44,386.65 3286.16,415.37 3353.72,415.37 R87.2@3362.44,406.65 ; v1(3100,1326.65) 3250,1326.65 ; v1(3155,516.65) 3157.56,519.21 R89.2@3200,519.21 ; R61.2@3175,1499.21 3181.16,1505.37 3481.28,1505.37 v1(3500,1486.65) ; R63.2@3197.56,1366.65 3210,1366.65 3250,1326.65 ; R81.2@3265,614.09 R83.2@3315,614.09 3325,604.09 v1(3325,565.65) 3370,610.65 v1(3370,701.65) ; R77.2@3270,979.21 3275.56,979.21 v1(3324,1027.65) 3324,963.65 3345,942.65 3421.65,942.65 3425.03,946.03 3445.23,946.03 3460.5,930.76 ; R66.2@3345,869.21 3366,890.21 3435.21,890.21 v1(3468.13,923.14) ; R42.2@3427.56,1476.65 3490,1476.65 v1(3500,1486.65) ; R99.1@3500,1584.09 v1(3500,1486.65) ; R70.2@3510,1089.41 3544.68,1089.41 R68.2@3565,1069.09 3565,1054.09 3617.44,1001.65 3683,1001.65 ; v3(3622.05,1614.17) 3793.57,1442.65 ; v1@3679.87,1106.86 3683,1103.73 3683,1001.65 ; v1@3680.66,1108.18 3690,1117.52 R72.2@3690,1174.09 ; R33.2@3720,1429.21 R33.2@3720,1442.65 ; v1(3839.06,1369.05) 3837.4,1369.05 3835,1366.65 3835,1401.22 3793.57,1442.65 ; 3910,445.43 3910,931.65 ; R21.2@4005,1484.21 3964.44,1484.21 v1(3963,1485.65) 3920,1442.65 3793.57,1442.65 ; R9.2@4065,1519.21 4076.44,1519.21 v1(4110,1485.65) ; AMP1.2@4205.51,1391.65 AMP1.2@4191.76,1391.65 ; R97.2@4207.44,1556.65 4206.69,1555.9 R96.2@4120,1555.9 4110,1545.9 v1(4110,1485.65) ; C29.2@4338.98,1196.65 4300.51,1196.65 AMP1.4@4205.51,1291.65 4191.76,1291.65 4151.21,1332.21 4151.21,1351.1 AMP1.2@4191.76,1391.65 ; 1205,1184.21 1215,1194.21 v1(1215,1216.65) 1215,1266.65 1310,1361.65 HDR3.16@1310,1551.65 ; 1772.44,369.21 1843,298.65 ; 1772.44,369.21 1772.44,368.21 1842,298.65 1843,298.65 ; 1843,298.65 1880,261.65 1950,261.65 1996,307.65 1996,321.65 ; 1843,298.65 1936,205.65 2168,205.65 2185,222.65 ; 1985,466.35 1985,426.96 1996,415.96 1996,321.65 ; 2185,222.65 2185,163.65 2203,145.65 2338.44,145.65 R5.1@2365,119.1 2400,119.1 2400,258.65 2451.98,310.63 2480,310.63 ; 2185,222.65 C8.2@2185,396.22 2210,396.22 2240,426.22 ; C25.2@2440,421.65 2440,350.63 2480,310.63 ; 2480,310.63 C16.2@2520,310.63 2535,310.63 2535,223.65 2584,174.65 2611,174.65 2645,208.65 2645,310.63 C15.2@2650,310.63 2736.98,310.63 2790,363.65 ; 3250,1326.65 3364,1440.65 3718,1440.65 R33.2@3720,1442.65 ; 3683,1001.65 3683,927.65 3736,874.65 3853,874.65 3910,931.65 ; R33.2@3720,1442.65 3793.57,1442.65 ; 3910,931.65 3920.55,942.21 4000.55,942.21 4060,1001.65 4060,1081.65 4110,1131.65 4110,1473.41 ; 4110,1473.41 v1(4110,1485.65) ; 4110,1473.41 AMP1.2@4191.76,1391.65
  Top Layer w25: REG2.9@1195,901.65 REG2.3@1195,982.95
  Top Layer w50: C34.2@1385,185.63 1428.98,185.63 1485,241.65 1740,241.65 v4(1822.5,159.15) ; v3(3622.05,157.48) 3910,445.43 4020,555.43 SPK1.2@4020,942.21
  Bottom Layer w10: R74.2@325,1144.21 308.19,1144.21 Q30.3@240.63,1076.65 240.63,906.17 405.15,741.65 VAR1.1@465,741.65 ; R60.2@335,1374.21 302.44,1341.65 275,1341.65 250.63,1317.28 Q12.3@250.63,1306.65 214,1306.65 188,1280.65 151,1280.65 140,1291.65 140,1431.65 322.52,1614.17 v3(421.26,1614.17) 1047.48,1614.17 HDR3.20@1110,1551.65 ; 665,571.65 664,572.65 664,600.65 Q52.3@695.32,631.97 762.56,699.21 R94.1@780,699.21 ; 718,379.65 495.83,157.48 v3(421.26,157.48) 537.09,41.65 v1(1690,41.65) ; Q42.3@900.63,891.65 900.63,911.32 930,940.69 955.96,940.69 v1(975,921.65) 975,902.28 Q40.3@985.63,891.65 ; Q6.3@915,406.65 888,379.65 677,379.65 665,391.65 665,459.03 751,545.03 751,565.35 738.7,577.65 721.3,577.65 714.3,570.65 641,570.65 590,621.65 590,746.65 635,791.65 733.87,791.65 734.71,790.81 751.98,790.81 752.82,791.65 777.18,791.65 778.02,790.81 1304.72,790.81 1355,841.09 1355,930.39 Q38.3@1343.74,941.65 ; R30.1@1000,469.21 978.19,469.21 Q6.3@915.63,406.65 1062.28,260 1275,260 1365,350 UART.3@1365,500 ; v1(1215,1216.65) 1265.63,1216.65 Q21.3@1355.63,1306.65 ; v1(1505,1076.65) 1505,1056.65 1565,996.65 1565,961.65 v1(1570,956.65) 1640,956.65 1821.28,775.37 ; v1(1688,1092.65) 1688,1354.65 1769,1435.65 ; v1(1695,451.65) 1885,261.65 v4(1925,261.65) ; v1(1785,1016.65) 1796.28,1027.94 1952.75,1027.94 1960,1035.19 1960,1082.28 ; v1(1799,1319.65) 1769,1349.65 1769,1435.65 ; v1(1905,1321.65) 1920.63,1321.65 Q53.3@1930.63,1331.65 1985.63,1386.65 2010,1386.65 2021,1375.65 2021,1332.02 Q51.3@2020.63,1331.65 ; HDR3.4@1910,1551.65 1910,1584.65 1869,1625.65 1869,1671.65 1848,1692.65 ; Q8.3@1930.63,1111.65 1960,1082.28 ; Q17.3@1935.63,896.65 1935,896.02 1935,856.65 ; Q35.3@1945.93,426.65 1945.93,442.59 v1(1965,461.65) 1990,486.65 2025,486.65 2036,475.65 2036,427.02 Q32.3@2035.63,426.65 ; Q23.3@2000.63,661.65 1999.63,660.65 1956,660.65 1944,672.65 1944,731.28 Q26.3@1944.37,731.65 1942.21,731.65 1917.43,756.43 1892.57,756.43 1886.13,749.99 1886.13,716.32 1872.27,702.47 1827.73,702.47 1821.28,708.91 1821.28,775.37 ; Q5.3@2030.63,1111.65 2013.65,1111.65 1988.87,1086.87 1964.59,1086.87 1960,1082.28 ; v1(2105,981.65) 2099.49,981.65 2025.63,907.79 Q14.3@2025.63,896.65 2015.79,896.65 1991.01,871.87 1950.22,871.87 1935,856.65 ; v1(2210,1456.65) 2235,1456.65 v1(2260,1481.65) ; v1(2236.32,1190.34) 2236.32,1197.97 2269,1230.65 2309,1230.65 2355,1184.65 ; Q20.3@2329.37,711.65 2333.37,715.65 2410,715.65 v1(2412,717.65) 2506,717.65 2520,731.65 v1(2520,756.65) ; Q29.3@2354.37,481.65 2354.37,422.28 v1(2405,371.65) ; Q49.3@2364.37,1396.65 2364.37,1432.28 ; v1(2400,771.65) 2350,771.65 2350,810.65 ; v1(2407.91,544.5) 2415,551.59 2415,616.44 v1(2471.6,673.04) ; R15.2@2415,1134.21 2417.56,1131.65 v1(2450,1131.65) ; R15.2@2415,1141.65 2385,1141.65 2375,1151.65 Q2.3@2369.37,1151.65 2355,1166.02 2355,1184.65 ; v1@2450,1126.65 2450,931.65 2365,931.65 2385,911.65 2385,845.65 2350,810.65 ; HDR2.16@2775.04,171.65 HDR2.13@2853.74,92.91 ; Q48.3@2795.63,1111.65 2795,1112.28 2795,1126.65 2845,1176.65 2855,1176.65 2880,1151.65 Q46.3@2880,1111.65 ; HDR2.13@2853.78,92.91 2853.78,93.69 2931.74,171.65 HDR2.12@2932.52,171.65 2973.52,212.65 3049,212.65 HDR2.8@3090,171.65 HDR2.6@3168.74,171.65 3227.74,230.65 3548.87,230.65 v3@3607.87,171.65 ; v1(2958,1202.65) 3160,1202.65 3189.37,1173.28 3189.37,1145.65 3289,1145.65 3305,1129.65 3341,1129.65 3475,1263.65 3475,1341.65 3451,1365.65 3434.37,1365.65 3434.37,1448.02 3472,1485.65 v1(3963,1485.65) v1(4110,1485.65) 4130,1465.65 4130,1396.65 4169,1357.65 4169,1185.65 4135,1151.65 Q19.3@3954.37,1151.65 ; HDR2.9@3011.26,92.91 HDR2.5@3168.74,92.91 ; Q16.3@3015.63,1331.65 3061.63,1377.65 3093.7,1377.65 3120.63,1350.72 Q13.3@3120.63,1331.65 3115.63,1326.65 v1(3100,1326.65) ; v1(3042,677.65) 3188,531.65 ; v1(3155,516.65) 3170,531.65 3188,531.65 ; HDR2.3@3247.48,92.91 HDR2.2@3326.22,171.65 v3@3607.87,171.65 ; Q41.3@3290.63,661.65 3265,636.02 3265,581.65 3280,566.65 3324,566.65 v1(3325,565.65) 3291,531.65 ; v1(3324,1027.65) 3510,1027.65 ; v1(3370,701.65) 3380,691.65 3380,662.28 Q39.3@3380.63,661.65 ; Q34.3@3380.63,886.65 3380.63,903.88 3412.45,935.69 3412.75,935.69 3419.19,942.14 3419.19,942.44 3422.79,946.03 3445.23,946.03 v1(3468.13,923.14) 3470.63,920.63 Q31.3@3470.63,886.65 ; Q45.3@3485.63,436.65 3486,437.02 3486,470.35 3473.7,482.65 3436.63,482.65 Q47.3@3390.63,436.65 3375,421.02 3375,347.65 ; Q25.3@3520.63,1131.65 3520.63,1116.02 3530,1106.65 ; Q22.3@3610.63,1131.65 3610.63,1107.28 3610,1106.65 ; v3(3622.05,157.48) v3@3607.87,171.65 ; v1(3680.66,1108.71) 3680.66,1108.18 3680.92,1107.92 3679.39,1107.92 3678.13,1106.65 3610,1106.65 ; Q37.3@3694.37,696.65 3699.37,691.65 3928,691.65 3972,735.65 ; Q7.3@3740.63,1331.65 3740.63,1346.23 3789.11,1394.71 3806.95,1394.71 3835,1366.65 3835,1341.02 Q4.3@3825.63,1331.65 ; Q43.3@3809.37,471.65 3824,471.65 3844,451.65 3844,353.65 ; 1769,1435.65 1769,1683.65 1778,1692.65 1848,1692.65 ; 1821.28,775.37 1826.57,780.65 1853.7,780.65 1875.98,802.94 1934.82,802.94 1938.54,806.65 ; 1848,1692.65 1928,1692.65 1951,1669.65 1951,1519.65 1989,1481.65 v1(2260,1481.65) ; 1935,856.65 1935,810.19 1938.54,806.65 ; 1938.54,806.65 1961.54,783.65 2180,783.65 v1(2192,771.65) 2193,772.65 2312,772.65 2350,810.65 ; v1(2260,1481.65) 2335,1481.65 2350,1466.65 2350,1446.65 2364.37,1432.28 ; 2355,1184.65 2355,1211.65 2400,1256.65 2400,1396.65 2364.37,1432.28 ; 3188,531.65 3291,531.65 ; 3291,531.65 3291,371.65 3315,347.65 3375,347.65 ; 3375,347.65 3394,347.65 3432,309.65 3800,309.65 3844,353.65 ; 3510,1027.65 3526,1011.65 3736,1011.65 3804.37,943.28 Q28.3@3804.37,936.65 3832.37,964.65 3963,964.65 3972,955.65 3972,735.65 ; 3510,1027.65 3510,1086.65 3530,1106.65 ; 3530,1106.65 3610,1106.65 ; 3844,353.65 3972,481.65 3972,735.65
  Bottom Layer w50: v4(1822.5,159.15) v4(1925,261.65)
  other v1: 2883.78,1149.54
JTAG_SEL: R5.2 U1.35 | length 496.2
  Top Layer w10: U1.35@2295.75,615.63 2295.75,552.65 2299,549.4 2299,195.65 2320.44,174.21 R5.2@2365,174.21
JTAG_TCK: HDR3.9 R1.1 U1.18 | length 2154.3
  Top Layer w10: HDR3.9@1610,1651.65 1652.69,1651.65 1697.69,1696.65 2406.58,1696.65 2423.72,1679.52 2423.72,1638.91 2417.27,1632.47 2353.37,1632.47 R1.1@2325,1604.1 ; v1(1800,856.65) 1844.7,856.65 1852.44,848.91 1874.91,848.91 1881.81,842.01 U1.18@2030,842.01
  Bottom Layer w10: HDR3.9@1610,1651.65 1610,1632.71 1555,1577.71 1555,1307.33 1562,1300.33 1562,1269.67 1555,1262.67 1555,1101.65 v1(1800,856.65)